# EAGLE board Lagopus_A (EAGLE 8.0.0)
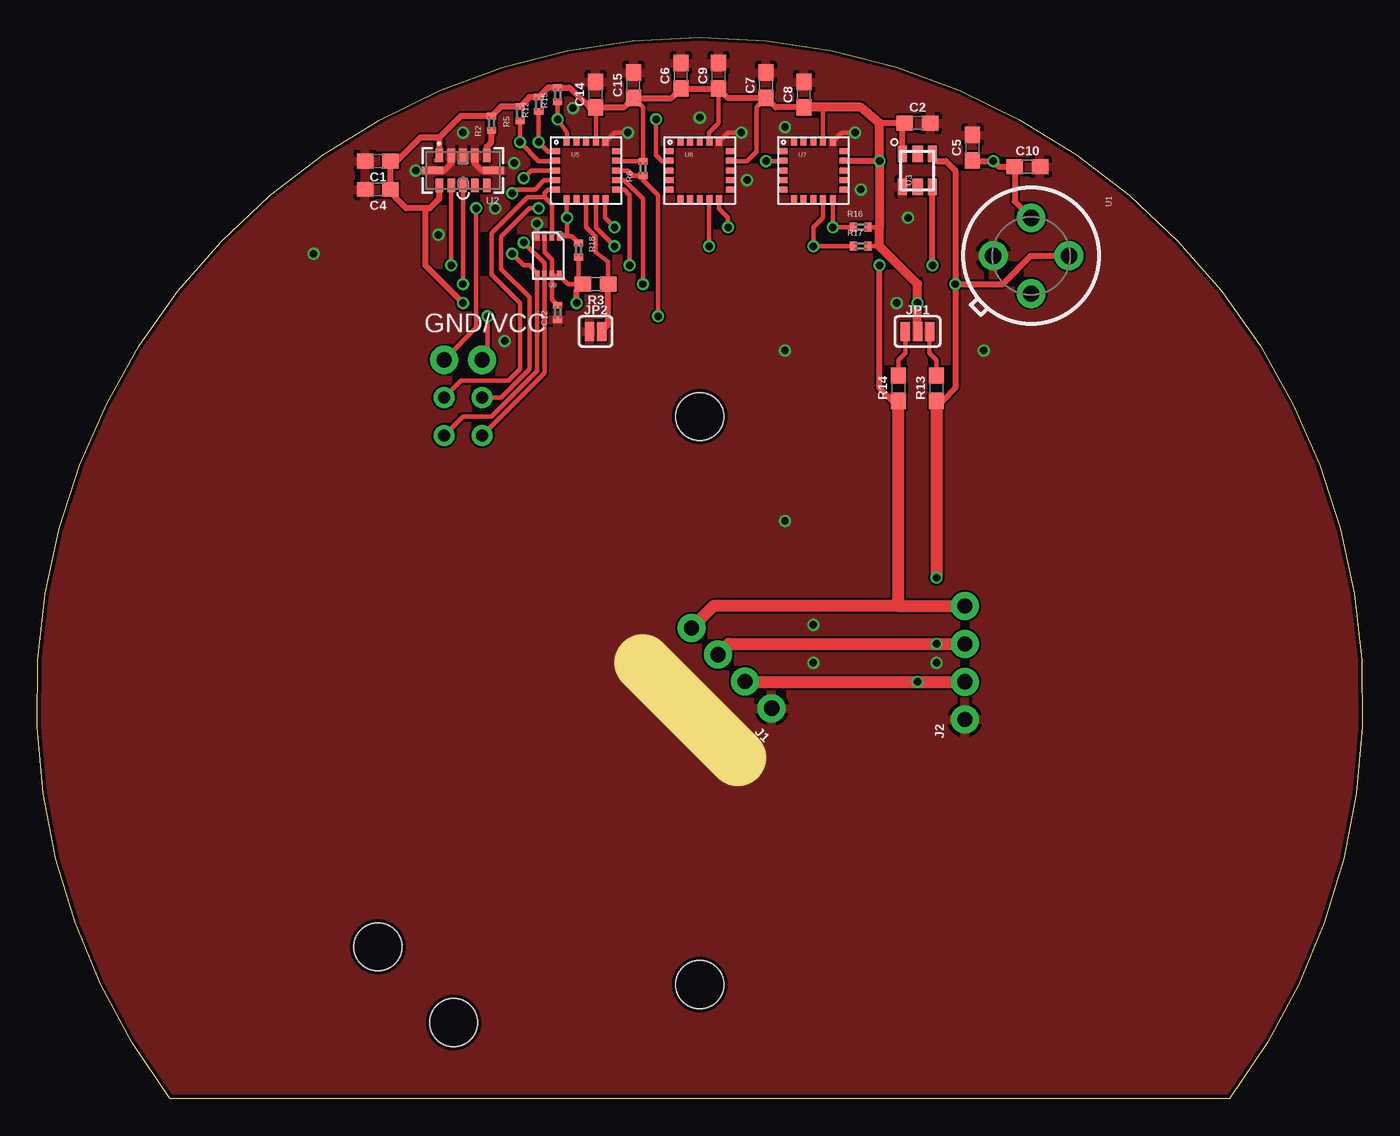
[diagram p0: board, top side]
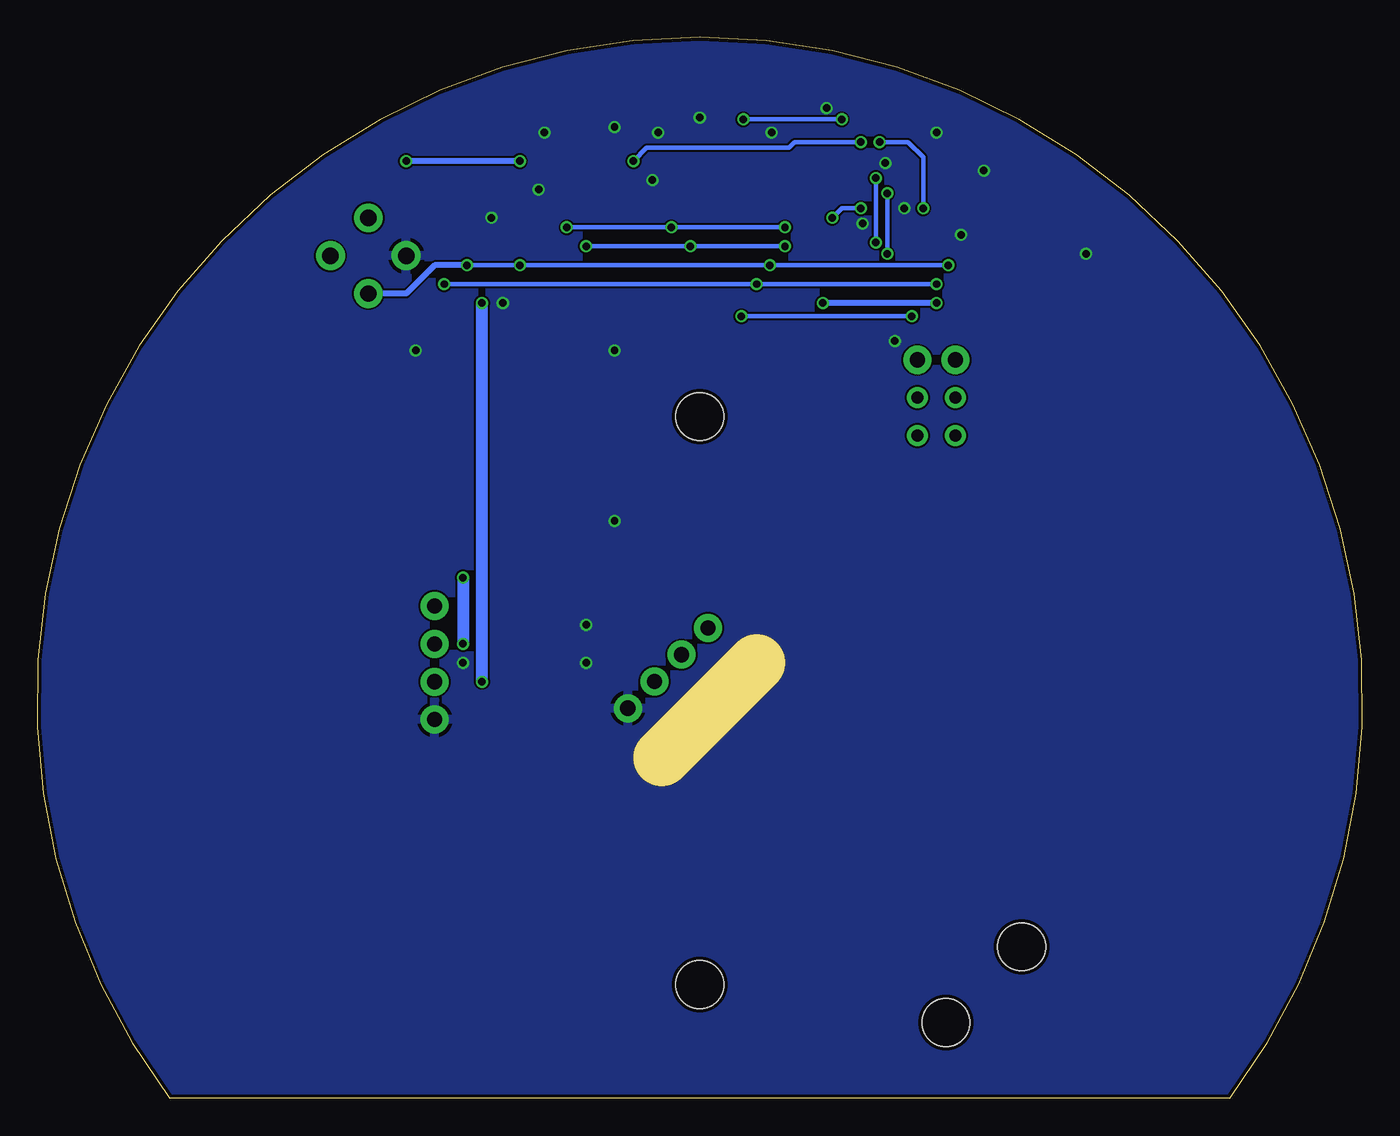
[diagram p1: board, bottom side, seen from below]

Size 88.86 x 71.17 mm. Coordinates in mm from the lower left corner, seen from the top.
Outline: 8.87,0 79.99,0 arc254 8.87,0
Copper layers (1*16): Top 0.035mm / dielectric 1.5mm / Bottom 0.035mm
Design rules "dirt_cheap_dirty_boards.v1": minimum track width 5mil, minimum drill 12mil, track to track 5mil, track to pad 5mil, pad to pad 5mil, via to via 5mil, smd to smd 0mil, copper to edge 10mil, drill to drill 10mil, minimum pad ring 10mil, minimum via ring 6mil, stop-mask expansion 2mil, vias tented up to drill 25mil, thermal gap 10mil
Holes 3.2 mm at 44.43,45.72 44.43,7.62 27.92,5.08 22.84,10.16
Milling: 1 lines

## Footprints (pad centres in the part's own frame; a part is rotated, then mirrored left to right if it is on the bottom)
0603 = smd 1.1 x 1: 1 -0.85,0; 2 0.85,0
C0402_B = smd 0.457 x 0.61: 1 -0.483,0; 2 0.483,0
1X02_NO_SILK = drill 1.016 pad 1.88: 1 0,0; 2 2.54,0
1X04_NO_SILK = drill 1.016 pad 1.88: 1 0,0; 2 2.54,0; 3 5.08,0; 4 7.62,0
SMT-JUMPER_3_2-NC_PASTE_SILK = smd 0.635 x 1.27: 1 -0.813,0; 2 0,0; 3 0.813,0
SMT-JUMPER_2_NO_SILK = smd 0.635 x 1.27: 1 -0.406,0; 2 0.406,0
R0402_B = smd 0.457 x 0.61: 1 -0.483,0; 2 0.483,0
TO-39 = drill 1.1 pad 1.93: 1 2.54,0; 2 0,2.54; 3 -2.54,0; 4 0,-2.54
VL53L1X = smd 0.5 x 0.9: 1 1.6,-1; 2 0.8,-1; 3 0,-1; 4 -0.8,-1; 5 -1.6,-1; 7 -1.6,1; 8 -0.8,1; 9 0,1; 10 0.8,1; 11 1.6,1 | smd 1.4 x 0.5: 6 -2.05,0; 12 2.05,0
CHIPLED-6 = smd 1.1 x 0.6: P1 1.1,1; P2 -1.1,1; P4 -1.1,-1; P5 1.1,-1 | smd 1.1 x 0.7: P3 -1.1,0; P6 1.1,0
AS7265X = smd 0.55 x 0.4: P$1 -2.025,1.3; P$2 -2.025,0.65; P$3 -2.025,0; P$4 -2.025,-0.65; P$5 -2.025,-1.3; P$11 2.025,-1.3; P$12 2.025,-0.65; P$13 2.025,0; P$14 2.025,0.65; P$15 2.025,1.3 | smd 0.4 x 0.55: P$6 -1.3,-1.925; P$7 -0.65,-1.925; P$8 0,-1.925; P$9 0.65,-1.925; P$10 1.3,-1.925; P$16 1.3,1.925; P$17 0.65,1.925; P$18 0,1.925; P$19 -0.65,1.925; P$20 -1.3,1.925
USON-8 = smd 0.3 x 0.65: P$1 -0.75,-1.325; P$2 -0.25,-1.325; P$3 0.25,-1.325; P$4 0.75,-1.325; P$5 0.75,1.325; P$6 0.25,1.325; P$7 -0.25,1.325; P$8 -0.75,1.325
HN01 = drill 0.813 pad 1.422: P$1 0,0

## Placement (x,y rotation side)
C1  4.7uF  [0603]  22.84,62.87 180 top
C2  0.1uF  [0603]  59.04,65.41 0 top
C4  0.1uF  [0603]  22.84,60.96 180 top
C5  10uF  [0603]  62.72,63.75 90 top
C6  1.0uF  [0603]  43.16,68.58 90 top
C7  1.0uF  [0603]  48.88,67.94 90 top
C8  10uF  [0603]  51.42,67.31 90 top
C9  10uF  [0603]  45.7,68.58 90 top
C10  0.1uF  [0603]  66.4,62.48 0 top
C12  1 uF  [C0402_B]  34.91,52.7 90 top
C14  1.0uF  [0603]  37.45,67.31 90 top
C15  10uF  [0603]  39.99,67.94 90 top
GND/VCC  M021X02_NO_SILK  [1X02_NO_SILK]  27.29,49.53 0 top
J1  PTH  [1X04_NO_SILK]  49.26,26.16 135 top
J2  PTH  [1X04_NO_SILK]  62.21,25.4 90 top
JP1  [SMT-JUMPER_3_2-NC_PASTE_SILK]  59.04,51.44 0 top
JP2  [SMT-JUMPER_2_NO_SILK]  37.45,51.44 0 top
R2  10 K  [R0402_B]  30.46,65.41 90 top
R3  10k  [0603]  37.45,54.61 180 top
R5  10 K  [R0402_B]  32.37,66.04 90 top
R6  10 K  [R0402_B]  40.62,62.36 90 top
R12  10 K  [R0402_B]  33.64,66.68 90 top
R13  4.7k  [0603]  60.31,47.62 90 top
R14  4.7k  [0603]  57.77,47.62 90 top
R15  10 K  [R0402_B]  34.91,67.31 90 top
R16  4K7  [R0402_B]  55.23,58.42 0 top
R17  4K7  [R0402_B]  55.23,57.15 0 top
R18  100K  [R0402_B]  36.3,56.9 270 top
U1  MLX90614_  [TO-39]  66.66,56.52 270 top
U2  VL53L1X  [VL53L1X]  28.56,62.23 180 top
U3  APDS-9301  [CHIPLED-6]  59.04,62.23 90 top
U5  AS72652  [AS7265X]  36.81,62.23 0 top
U6  AS72651  [AS7265X]  44.43,62.23 0 top
U7  AS72653  [AS7265X]  52.05,62.23 0 top
U8  MX25L4006E  [USON-8]  34.27,56.52 180 top
U$1  HN01  [HN01]  27.29,44.45 90 top
U$2  HN01  [HN01]  29.83,44.45 90 top
U$7  HN01  [HN01]  29.83,46.99 90 top
U$8  HN01  [HN01]  27.29,46.99 90 top

## Library data of the parts
C1 = SparkFun-Capacitors; PROD_ID: CAP-08280
C2 = SparkFun-Capacitors; PROD_ID: CAP-08604
C4 C10 = SparkFun-Capacitors; PROD_ID: CAP-00810
C5 C8 C9 C15 = SparkFun-Capacitors; PROD_ID: CAP-11015
C6 C7 C14 = SparkFun-Capacitors; PROD_ID: CAP-00868
C12 R2 R5 R6 R12 R15-R18 = Spark
GND/VCC = SparkFun-Connectors
J1 J2 = SparkX
JP1 JP2 = SparkFun-Jumpers
R3 = SparkFun-Resistors; PROD_ID: RES-00824
R13 R14 = SparkFun-Resistors; PROD_ID: RES-07857
U1 = SparkFun
U2 = SparkFun-Sensors; PROD_ID: IC-13960
U3 = SparkFun-Sensors; PROD_ID: IC-13662
U5-U8 = kris
U$1 U$2 U$7 U$8 = PWSONN6

## Nets
3.3V: C1.1 C2.1 C4.1 C5.1 C6.1 C7.1 C8.1 C9.1 C10.1 C12.2 C14.1 C15.1 J1.2 J2.2 JP1.2 R2.2 R3.2 R5.2 R6.2 R12.2 R15.2 R16.2 R17.2 R18.2 U1.3 U2.1 U2.11 U3.P1 U5.P$14 U5.P$17 U6.P$14 U6.P$17 U7.P$14 U7.P$17 U8.P$3 U8.P$7 U8.P$8
!CS: R18.1 U5.P$6 U8.P$1 U$7.P$1
!INT: GND/VCC.2 R6.1 U5.P$13
!RST: GND/VCC.1 R5.1 U5.P$2
!SHUT: R2.1 U2.5
DRV1: U5.P$15
DRV2: U7.P$15
DRV3: U6.P$15
GND: C1.2 C2.2 C4.2 C5.2 C6.2 C7.2 C8.2 C9.2 C10.2 C12.1 C14.2 C15.2 J1.1 J2.1 JP2.1 U1.4 U2.2 U2.3 U2.4 U2.6 U2.12 U3.P2 U5.P$16 U6.P$16 U7.P$16 U8.P$4
I2C_EN: JP2.2 R3.1 U5.P$8
IND1: U5.P$18
N$7: JP1.3 R13.2
N$8: JP1.1 R14.2
SCK: U5.P$3 U8.P$6 U$2.P$1
SCL: J1.4 J2.4 R14.1 U1.1 U2.10 U3.P4 U5.P$11
SCL_M: R17.1 U5.P$9 U6.P$9 U7.P$9
SDA: J1.3 J2.3 R13.1 U1.2 U2.9 U3.P5 U5.P$12
SDA_M: R16.1 U5.P$10 U6.P$10 U7.P$10
SI: U5.P$4 U8.P$5 U$1.P$1
SLV1_RESN: R12.1 U5.P$1 U7.P$2
SLV2_RESN: R15.1 U5.P$20 U6.P$2
SO: U5.P$5 U8.P$2 U$8.P$1

## Tracks (layer width: path | path; a pad name or v marks a point on that pad's centre or on a via)
3.3V  (via drill 0.5)
  Top 0.305: U5.P$14 38.85,62.87 40.6,62.87 R6.2 40.62,66.46 C15.1 | U6.P$14 46.47,62.87 47.61,62.87 48.24,63.5 48.24,66.46 C7.1 | U6.P$17 45.07,64.17 45.07,64.77 45.7,65.41 C9.1 | U8.P$7 U8.P$8 35.6,54.61 R3.2 arc-90 36.3,54.9 R18.2 | 54.09,62.87 U7.P$14 | 52.69,64.17 U7.P$17 52.69,64.16 52.69,66.46 | R17.2 56.5,57.15 | R16.2 56.5,58.42 | U8.P$3 34.02,56.77 34.52,56.27 U8.P$7 | C12.2 34.52,53.57 U8.P$7 | U5.P$17 37.46,66.44 C14.1
  Top 0.406: C2.1 58.04,65.41 | C2.1 56.5,65.41 | U7.P$14 v56.5,62.88 v56.5,62.87 | U3.P1 58.04,65.25 C2.1 | 26.96,64.44 U2.1 | 26.96,64.44 25.69,64.44 24.11,62.87 C1.1 C4.1 23.69,60.75 24.75,59.69 26.02,59.69 | 26.96,64.44 28.4,65.89 R2.2 31.1,66.52 R5.2 33,67.16 R12.2 34.27,67.79 R15.2 35.69,67.79 37.03,66.46 C14.1 39.35,66.46 C15.1 42.53,67.09 C6.1 C9.1 46.34,67.09 C7.1 49.51,66.46 C8.1 | v36.18,53.34 36.18,54.19 R3.2 | 26.02,59.69 26.02,55.88 v28.56,53.34 | C5.1 62.76,62.87 v64.12,62.87 64.5,62.48 C10.1 65.55,60.16 U1.3 | 26.02,59.69 26.32,59.69 26.96,60.33 U2.11
  Top 0.61: C8.1 52.69,66.46 55.23,66.46 56.5,65.41 v56.5,62.87 56.5,58.42 56.5,57.15 59.04,54.61 v59.04,53.34 JP1.2
  Top 0.813: J1.2 47.48,27.94 v59.04,27.94 J2.2
  Bottom 0.406: v28.56,53.34 v36.18,53.34 | v56.5,62.87 v64.12,62.87
  Bottom 0.813: v59.04,27.94 v59.04,53.34
!CS  (via drill 0.5)
  Top 0.305: R18.1 35.84,57.84 35.54,57.84 | 35.54,57.84 U8.P$1 | v33.64,59.69 33,59.69 31.1,57.78 31.1,55.63 33,53.72 33,48.9 31.1,46.99 U$7.P$1 | U5.P$6 35.51,59.09 v35.54,59.05 35.54,57.84
  Bottom 0.305: v35.54,59.05 34.91,59.69 v33.64,59.69
!INT  (via drill 0.5)
  Top 0.305: U5.P$13 39.61,62.23 39.96,61.87 R6.1 40.62,61.59 41.64,60.58 v41.64,52.45 | v30.21,52.45 30.21,49.91 GND/VCC.2
  Bottom 0.305: v41.64,52.45 v30.21,52.45
!RST  (via drill 0.5)
  Top 0.305: U5.P$2 34.77,62.87 33.64,62.87 v32.37,64.14 R5.1 | v29.45,59.69 29.45,51.69 GND/VCC.1
  Bottom 0.305: v32.37,64.14 30.46,64.14 29.45,63.12 v29.45,59.69
!SHUT
  Top 0.406: U2.5 30.16,63.83 30.46,64.14 R2.1
GND  (via drill 0.5)
  Top 0.305: U5.P$16 38.72,64.76 38.72,64.77 v39.61,64.77 | U6.P$16 46.34,64.76 46.34,64.77 v47.23,64.77 | U7.P$16 53.96,64.76 53.96,64.77 v54.85,64.77 | U8.P$4 33.51,57.85 v33.51,58.67
  Top 0.406: U2.12 27.29,62.23 27.76,62.7 U2.2 | U2.6 29.83,62.23 29.36,62.7 U2.4
  other vias: 52.05,31.75 50.15,38.73 60.31,29.21 52.05,29.21 25.38,62.23 44.43,65.79 50.15,65.15 50.15,50.17 55.23,60.96 28.56,64.77 31.99,62.74 47.61,61.59 57.64,53.34 63.48,50.17 35.92,66.42 18.52,56.64 26.91,57.91 30.72,59.69 31.35,50.8 58.4,59.05
  pour Bottom: -2.56,-2.54 -2.56,76.2 93.96,76.2 93.96,-2.54
  pour Top: -6.37,80.01 -6.37,-3.81 101.58,-3.81 101.58,78.74
I2C_EN
  Top 0.305: U5.P$8 36.81,58.42 37.45,57.78 37.45,56.77 38.3,56.13 R3.1
  Top 0.406: JP2.2 38.3,51.88 R3.1
N$7
  Top 0.305: R13.2 60.31,49.53 59.85,49.99 JP1.3
N$8
  Top 0.305: R14.2 57.77,49.53 58.22,49.99 JP1.1
SCK  (via drill 0.5)
  Top 0.305: U5.P$3 33.13,62.23 v32.62,61.72 | v32.62,57.4 34.02,56 U8.P$6 34.02,48.65 U$2.P$1
  Bottom 0.305: v32.62,57.4 v32.62,61.72
SCL  (via drill 0.5)
  Top 0.305: U5.P$11 38.84,60.96 | U5.P$11 38.87,60.96 | v39.73,55.88 39.73,60.58 39.38,60.93 U5.P$11 | v27.76,55.88 U2.10
  Top 0.406: R14.1 57.35,46.78 56.5,47.62 v56.5,55.88 | v60.05,55.88 60.04,55.9 U3.P4
  Top 0.813: J1.4 45.34,33.02 57.77,33.02 | 57.77,33.02 J2.4 | 57.77,33.02 R14.1
  Bottom 0.305: v60.05,55.88 v56.5,55.88 v39.73,55.88 v27.76,55.88
  Bottom 0.406: v60.05,55.88 62.21,55.88 64.12,53.98 U1.1
SCL_M  (via drill 0.5)
  Top 0.305: 37.45,60.29 U5.P$9 37.46,58.41 v38.72,57.15 | R17.1 v52.05,57.15 52.05,58.42 52.7,59.07 U7.P$9 | v45.07,57.15 45.07,60.29 U6.P$9
  Bottom 0.305: v38.72,57.15 v45.07,57.15 v52.05,57.15
SDA  (via drill 0.5)
  Top 0.305: v40.62,54.61 40.62,60.33 39.37,61.58 U5.P$12 | v28.56,54.61 U2.9
  Top 0.406: U3.P5 60.04,63.23 60.31,62.87 60.94,62.87 61.58,62.23 v61.58,54.61 | v61.58,54.61 61.58,47.62 60.73,46.78 R13.1 | v61.58,54.61 64.75,54.61 66.66,56.52 U1.2
  Top 0.813: J1.3 46.39,30.48 v60.31,30.48 J2.3 | R13.1 v60.31,34.93
  Bottom 0.305: v61.58,54.61 v40.62,54.61 v28.56,54.61
  Bottom 0.813: v60.31,34.93 v60.31,30.48
SDA_M  (via drill 0.5)
  Top 0.305: U5.P$10 38.08,60.27 38.08,59.05 v38.72,58.42 | 45.7,60.3 U6.P$10 45.73,59.66 46.34,59.05 v46.34,58.42 | U7.P$10 v53.35,58.42 R16.1
  Bottom 0.305: v38.72,58.42 v46.34,58.42 v53.35,58.42
SI  (via drill 0.5)
  Top 0.305: v31.86,56.64 32.62,55.88 33,55.88 33.52,55.36 U8.P$5 33.52,54.61 33.52,54.5 33.52,48.78 30.46,45.72 28.56,45.72 U$1.P$1 | U5.P$4 34,61.58 33.38,60.96 32.11,60.96 v31.86,60.71
  Bottom 0.305: v31.86,56.64 v31.86,60.71
SLV1_RESN  (via drill 0.5)
  Top 0.305: U7.P$2 50.01,62.87 v48.88,62.87 | U5.P$1 34.76,63.5 34.27,63.5 v33.64,64.14 R12.1
  Bottom 0.305: v33.64,64.14 38.08,64.14 38.46,63.75 47.99,63.75 v48.88,62.87
SLV2_RESN  (via drill 0.5)
  Top 0.305: U5.P$20 35.54,64.19 35.54,64.77 v34.91,65.66 R15.1 | v41.51,65.66 41.51,63.25 41.89,62.87 42.39,62.87 U6.P$2
  Bottom 0.305: v34.91,65.66 v41.51,65.66
SO
  Top 0.305: U5.P$5 34.76,60.96 34.27,60.96 34.02,60.71 34.02,60.45 | 34.02,60.45 32.87,60.45 30.46,58.04 30.46,55.25 32.37,53.34 32.37,48.9 31.6,48.13 28.43,48.13 U$8.P$1 | U8.P$2 34.52,59.95 34.02,60.45